# EAGLE board Active_rectifier (EAGLE 8.3.2)
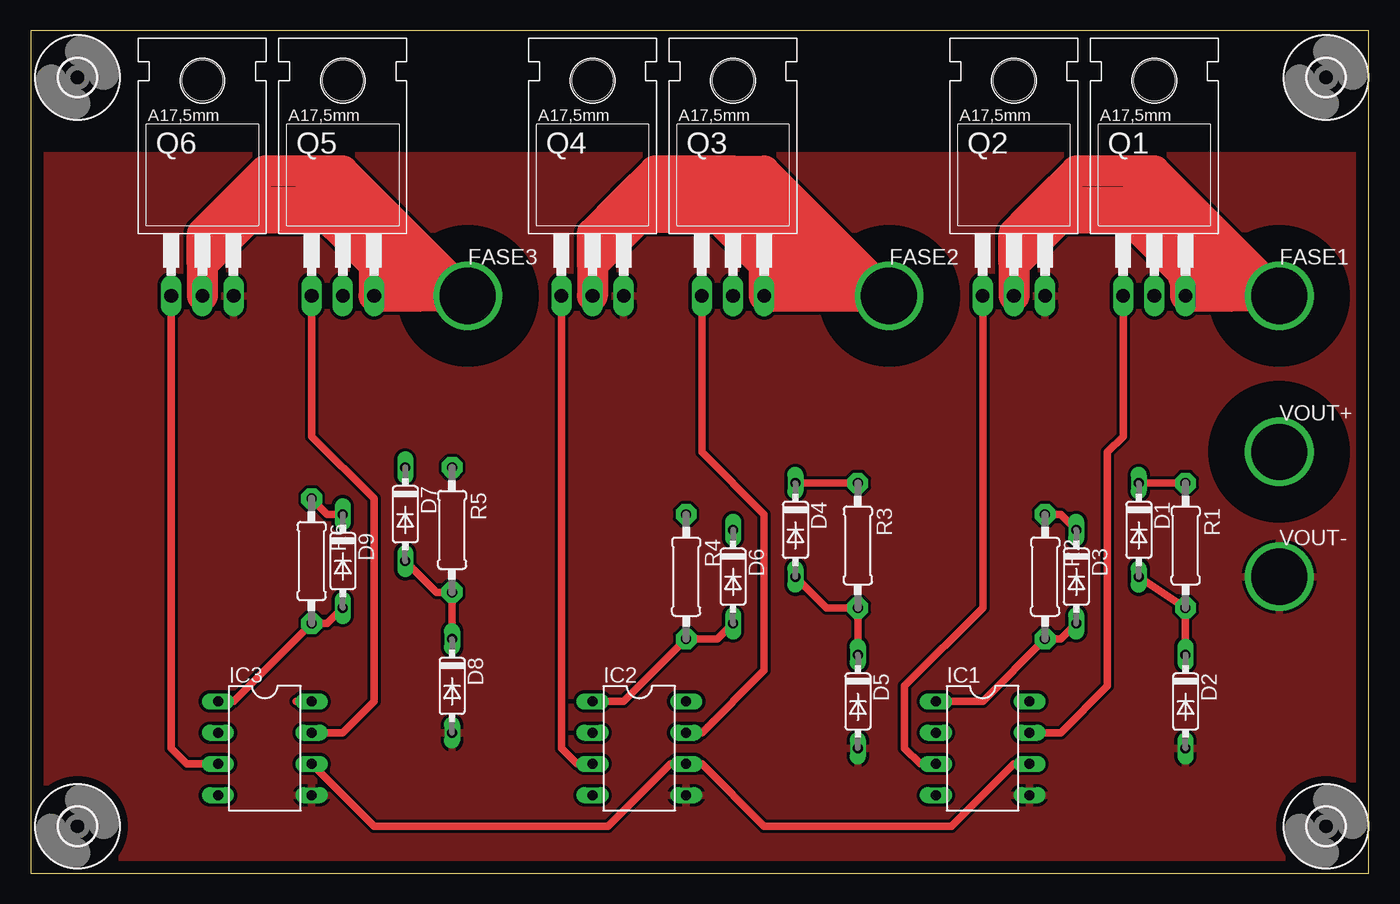
[diagram p0: board, top side]
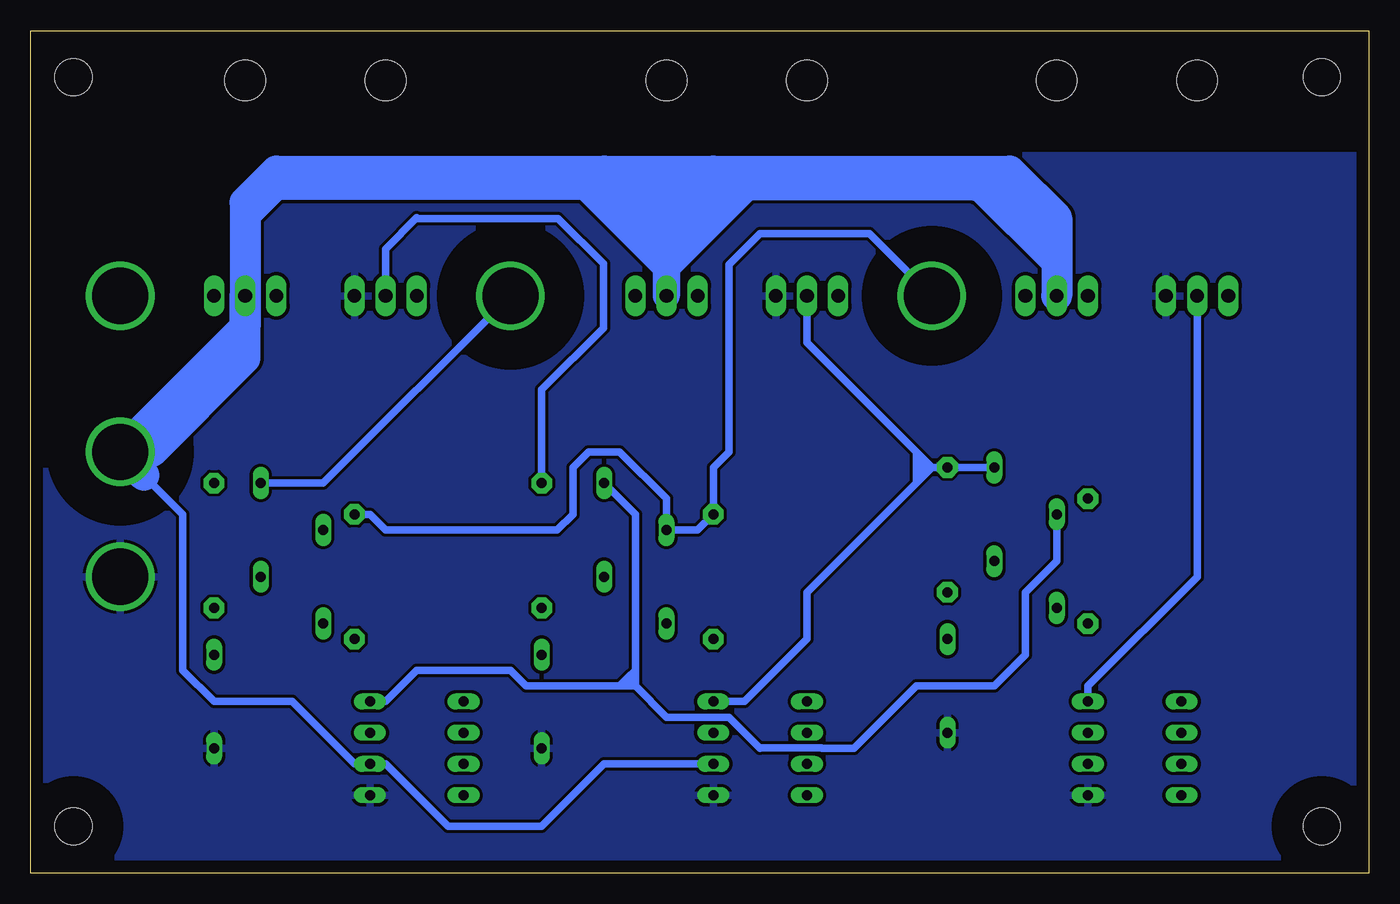
[diagram p1: board, bottom side, seen from below]

Size 108.89 x 68.57 mm. Coordinates in mm from the lower left corner, seen from the top.
Outline: 0,0 108.89,0 108.89,68.57 0,68.57 0,0
Copper layers (1*16): Top 0.035mm / dielectric 1.5mm / Bottom 0.035mm
Design rules "default *": minimum track width 6mil, minimum drill 0.35mm, track to track 10mil, track to pad 10mil, pad to pad 10mil, via to via 10mil, smd to smd 10mil, copper to edge 40mil, drill to drill 10mil, minimum pad ring 10mil, minimum via ring 8mil, stop-mask expansion 4mil, vias tented up to drill 0mil, thermal gap 10mil
tRestrict: area 29.9,41.3 to 41.2,52.7; area 64.2,41.3 to 75.5,52.7; area 95.9,28.6 to 107.3,40; area 95.9,41.3 to 107.3,52.7
bRestrict: area 30.2,41.6 to 40.9,52.4; area 64.2,41.3 to 75.5,52.7; area 96.4,41.8 to 106.8,52.2; area 95.9,28.6 to 107.3,40

## Footprints (pad centres in the part's own frame; a part is rotated, then mirrored left to right if it is on the bottom)
DO35-7 = drill 0.813 long: A 3.81,0; C -3.81,0
PAD_0.1800 = drill 4.572 pad 4.572: 1 0,0
DIL08 = drill 0.813 long: 1 -3.81,-3.81; 2 -1.27,-3.81; 3 1.27,-3.81; 4 3.81,-3.81; 5 3.81,3.81; 6 1.27,3.81; 7 -1.27,3.81; 8 -3.81,3.81
TO220 = drill 1.118 long: 1 -2.54,-6.35; 2 0,-6.35; 3 2.54,-6.35 | hole 3.302: 0,11.176
0207/10 = drill 0.813 pad 1.676 octagon: 1 -5.08,0; 2 5.08,0
3,0 = hole 3: 0,0

## Placement (x,y rotation side)
D1  1N4148DO35-7  [DO35-7]  90.17,27.94 270 top
D2  1N4148DO35-7  [DO35-7]  93.98,13.97 270 top
D3  1N4148DO35-7  [DO35-7]  85.09,24.13 270 top
D4  1N4148DO35-7  [DO35-7]  62.23,27.94 270 top
D5  1N4148DO35-7  [DO35-7]  67.31,13.97 270 top
D6  1N4148DO35-7  [DO35-7]  57.15,24.13 270 top
D7  1N4148DO35-7  [DO35-7]  30.48,29.21 270 top
D8  1N4148DO35-7  [DO35-7]  34.29,15.24 270 top
D9  1N4148DO35-7  [DO35-7]  25.4,25.4 270 top
FASE1  SPECIAL_DRILL_0.1800  [PAD_0.1800]  101.6,46.99 0 top
FASE2  SPECIAL_DRILL_0.1800  [PAD_0.1800]  69.85,46.99 0 top
FASE3  SPECIAL_DRILL_0.1800  [PAD_0.1800]  35.56,46.99 0 top
IC1  [DIL08]  77.47,10.16 270 top
IC2  [DIL08]  49.53,10.16 270 top
IC3  [DIL08]  19.05,10.16 270 top
Q1  BUZ10  [TO220]  91.44,53.34 0 top
Q2  BUZ10  [TO220]  80.01,53.34 0 top
Q3  BUZ10  [TO220]  57.15,53.34 0 top
Q4  BUZ10  [TO220]  45.72,53.34 0 top
Q5  BUZ10  [TO220]  25.4,53.34 0 top
Q6  BUZ10  [TO220]  13.97,53.34 0 top
R1  [0207/10]  93.98,26.67 270 top
R2  [0207/10]  82.55,24.13 270 top
R3  [0207/10]  67.31,26.67 270 top
R4  [0207/10]  53.34,24.13 270 top
R5  [0207/10]  34.29,27.94 270 top
R6  [0207/10]  22.86,25.4 270 top
U$5  [3,0]  3.81,64.77 0 top
U$6  [3,0]  3.81,3.81 0 top
U$7  [3,0]  105.41,3.81 0 top
U$8  [3,0]  105.41,64.77 0 top
VOUT+  SPECIAL_DRILL_0.1800  [PAD_0.1800]  101.6,34.29 0 top
VOUT-  SPECIAL_DRILL_0.1800  [PAD_0.1800]  101.6,24.13 0 top

## Library data of the parts
D1-D9 = diode
FASE1-FASE3 VOUT+ VOUT- = special-drill
IC1-IC3 = ic-package
Q1-Q6 = transistor-fet
R1-R6 = !MyLib
U$5-U$8 = holes

## Nets
GND: D2.A D5.A D8.A IC1.5 IC2.5 IC3.5 Q2.3 Q4.3 Q6.3 VOUT-.1
N$1: D1.A D2.C R1.2
N$2: IC1.7 Q1.1
N$3: D3.A IC1.1 R2.2
N$4: D4.A D5.C R3.2
N$6: IC1.3 Q2.1
N$7: D6.A IC2.1 R4.2
N$8: D3.C D6.C FASE3.1 IC3.8 Q5.3 Q6.2 R2.1 R4.1
N$9: D7.A D8.C R5.2
N$10: D4.C D9.C FASE1.1 IC1.8 Q1.3 Q2.2 R3.1 R6.1
N$11: IC2.3 Q4.1
N$12: D9.A IC3.1 R6.2
N$15: IC1.6 IC2.6 IC3.6 Q1.2 Q3.2 Q5.2 VOUT+.1
N$16: IC2.7 Q3.1
N$17: D1.C D7.C FASE2.1 IC2.8 Q3.3 Q4.2 R1.1 R5.1
N$18: IC3.3 Q6.1
N$20: IC3.7 Q5.1

## Tracks (layer width: path | path; a pad name or v marks a point on that pad's centre or on a via)
GND
  pour Bottom: 110.49,58.42 110.49,-1.27 -1.27,-1.27 -1.27,58.42
  pour Top: -1.27,58.42 -1.27,-1.27 110.49,-1.27 110.49,58.42
N$1
  Top 0.61: D2.C R1.2 D1.A
N$2
  Top 0.61: IC1.7 83.82,11.43 87.63,15.24 87.63,34.29 88.9,35.56 Q1.1
N$3
  Top 0.61: D3.A 83.82,19.05 R2.2 77.47,13.97 IC1.1
N$4
  Top 0.61: D4.A 64.77,21.59 R3.2 D5.C
N$6
  Top 0.61: IC1.3 72.39,8.89 71.12,10.16 71.12,15.24 77.47,21.59 Q2.1
N$7
  Top 0.61: D6.A 55.88,19.05 R4.2 48.26,13.97 IC2.1
N$8
  Top 0.61: R2.1 83.82,29.21 D3.C | IC3.8 21.59,13.97
  Top 2.54: 31.75,46.99 Q5.3 27.94,49.53 | 33.02,46.99 31.75,46.99 | 33.02,46.99 FASE3.1 25.4,57.15 21.59,57.15 | 13.97,49.53 Q6.2 | 13.97,49.53 13.97,52.07 16.51,54.61 | 26.67,53.34 25.4,54.61 | 26.67,53.34 27.94,52.07 27.94,50.8 | 27.94,49.53 27.94,50.8 | 16.51,54.61 19.05,54.61 | 19.05,54.61 22.86,54.61 | 22.86,54.61 25.4,54.61 | 31.75,46.99 27.94,50.8 | 26.67,53.34 33.02,46.99 | 16.51,54.61 19.05,57.15 21.59,57.15 | 21.59,57.15 22.86,57.15 25.4,54.61 | 24.77,52.7 22.86,54.61 | 24.77,52.7 27.94,49.53 | 19.05,54.61 17.78,53.34 | 17.78,53.34 13.97,49.53 | 17.78,53.34 24.13,53.34 24.77,52.7
  Bottom 0.61: IC3.8 22.86,15.24 13.97,24.13 Q6.2 | R2.1 81.28,29.21 80.01,27.94 66.04,27.94 64.77,29.21 64.77,33.02 63.5,34.29 60.96,34.29 57.15,30.48 D6.C 54.61,27.94 R4.1 53.34,33.02 52.07,34.29 52.07,49.53 49.53,52.07 40.64,52.07 FASE3.1
N$9
  Top 0.61: D8.C R5.2 33.02,22.86 D7.A
N$10
  Top 0.61: D4.C R3.1 | D9.C 24.13,29.21 R6.1
  Top 2.54: 97.79,46.99 Q1.3 93.98,48.26 | 99.06,46.99 97.79,46.99 | 100.33,46.99 99.06,46.99 | 100.33,46.99 FASE1.1 91.44,57.15 88.9,57.15 | 80.01,49.53 Q2.2 | 80.01,49.53 80.01,52.07 81.28,53.34 | 81.28,53.34 82.55,54.61 | 82.55,54.61 85.09,54.61 | 85.09,54.61 88.9,54.61 | 88.9,54.61 91.44,54.61 93.98,52.07 | 93.98,50.8 93.98,52.07 | 93.98,48.26 93.98,50.8 | 97.79,46.99 93.98,50.8 | 93.98,52.07 99.06,46.99 | 82.55,54.61 85.09,57.15 88.9,57.15 | 88.9,57.15 90.17,57.15 100.33,46.99 | 85.09,54.61 80.01,49.53 | 93.98,48.26 93.8,48.44 93.8,48.81 89.72,52.89 | 88.9,54.61 88.9,53.71 89.72,52.89 | 81.28,53.34 89.27,53.34 89.72,52.89
  Bottom 0.61: D9.C 25.4,25.4 27.94,22.86 27.94,17.78 30.48,15.24 36.83,15.24 41.91,10.16 44.5,10.16 44.55,10.21 49.48,10.21 49.53,10.16 52.07,12.7 57.15,12.7 59.69,15.24 | Q2.2 80.01,50.8 77.47,53.34 77.41,53.28 65.97,53.28 62.29,49.59 62.29,44.38 67.31,39.37 R3.1 | 59.69,16.51 59.69,15.24 | 59.69,16.51 59.69,29.21 D4.C | IC1.8 80.01,13.97 77.47,16.51 69.85,16.51 68.58,15.24 60.96,15.24 | 59.69,15.24 60.96,15.24 | 60.33,15.88 60.96,15.24 | 60.33,15.88 59.69,16.51 | 59.69,15.24 60.33,15.88
N$11
  Top 0.61: IC2.3 44.45,8.89 43.18,10.16 Q4.1
N$12
  Top 0.61: D9.A 24.13,20.32 R6.2 16.51,13.97 IC3.1
N$15
  Top 0.61: IC1.6 80.01,8.89 74.93,3.81 59.69,3.81 54.61,8.89 IC2.6 52.07,8.89 46.99,3.81 27.94,3.81 IC3.6
  Bottom 0.61: 99.7,32.38 96.52,29.21 96.52,16.51 93.98,13.97 87.63,13.97 82.55,8.89 IC1.6 80.01,8.89 74.93,3.81 67.31,3.81 62.23,8.89 IC2.6
  Bottom 2.2: 25.4,49.53 31.75,55.88 50.8,55.88 53.34,55.88 57.15,52.07 57.15,49.53 | 57.15,49.53 Q3.2 57.15,49.53 | 63.5,55.88 88.9,55.88 91.44,53.34 Q1.2
  Bottom 2.54: Q5.2 25.4,49.53 25.4,53.34 | 62.23,57.15 88.9,57.15 91.44,54.61 Q1.2 | 62.23,57.15 53.34,57.15 | Q1.2 91.44,44.45 VOUT+.1 | 53.34,57.15 55.88,54.61 57.15,55.88 59.69,55.88 57.15,53.34 57.15,52.07 62.23,57.15 | 25.4,53.34 29.21,57.15 53.34,57.15 | 25.4,53.34 27.94,53.34 30.48,55.88 31.75,55.88 | 50.8,55.88 57.15,49.53 63.5,55.88 | Q1.2 91.44,41.91 99.06,34.29 VOUT+.1 | VOUT+.1 99.7,32.38
N$16
  Top 0.61: IC2.7 54.61,11.43 59.69,16.51 59.69,29.21 54.61,34.29 Q3.1
N$17
  Top 0.61: R1.1 D1.C
  Top 2.54: 63.5,46.99 Q3.3 59.69,49.53 | 63.5,46.99 66.04,46.99 | 66.04,46.99 FASE2.1 | 45.72,49.53 Q4.2 | 45.72,49.53 45.72,52.07 48.26,54.61 | 48.26,54.61 57.15,54.61 58.42,53.34 | 59.69,52.07 58.42,53.34 | 59.69,52.07 59.69,50.8 | 59.69,49.53 59.69,50.8 | 63.5,46.99 59.69,50.8 | 66.04,46.99 64.77,46.99 59.69,52.07 | 48.26,54.61 50.8,57.15 53.34,57.15 | 54.61,57.15 53.34,57.15 | 54.61,57.15 55.88,55.88 49.53,55.88 48.26,54.61 | 59.69,50.8 59.69,52.07 | 59.69,52.07 58.42,53.34 | 58.42,53.34 54.61,57.15 | FASE2.1 67.31,46.99 57.15,57.15 53.34,57.15 | FASE2.1 59.69,57.15 53.34,57.15 | 58.42,53.34 55.88,53.34 | 55.88,53.34 49.53,53.34 45.72,49.53 | 55.88,53.34 59.69,49.53
  Bottom 0.61: D7.C R5.1 35.56,33.02 | 36.2,33.66 35.56,33.02 | 36.2,33.66 36.83,34.29 | 36.83,34.29 45.72,43.18 Q4.2 | IC2.8 50.8,13.97 45.72,19.05 45.72,22.86 36.83,31.75 | 36.2,32.38 36.83,31.75 | 36.2,32.38 35.56,33.02 | D1.C 85.09,31.75 FASE2.1 | 36.83,34.29 36.83,33.02 | 36.83,33.02 36.83,31.75 | 35.56,33.02 36.83,33.02 | 36.83,31.75 36.83,33.02 | 36.83,33.02 36.2,33.66 | 36.83,33.02 36.2,32.38
N$18
  Top 0.61: Q6.1 11.43,10.16 12.7,8.89 IC3.3
N$20
  Top 0.61: IC3.7 25.4,11.43 27.94,13.97 27.94,30.48 22.86,35.56 Q5.1